# EAGLE board for_china (EAGLE 6.3)
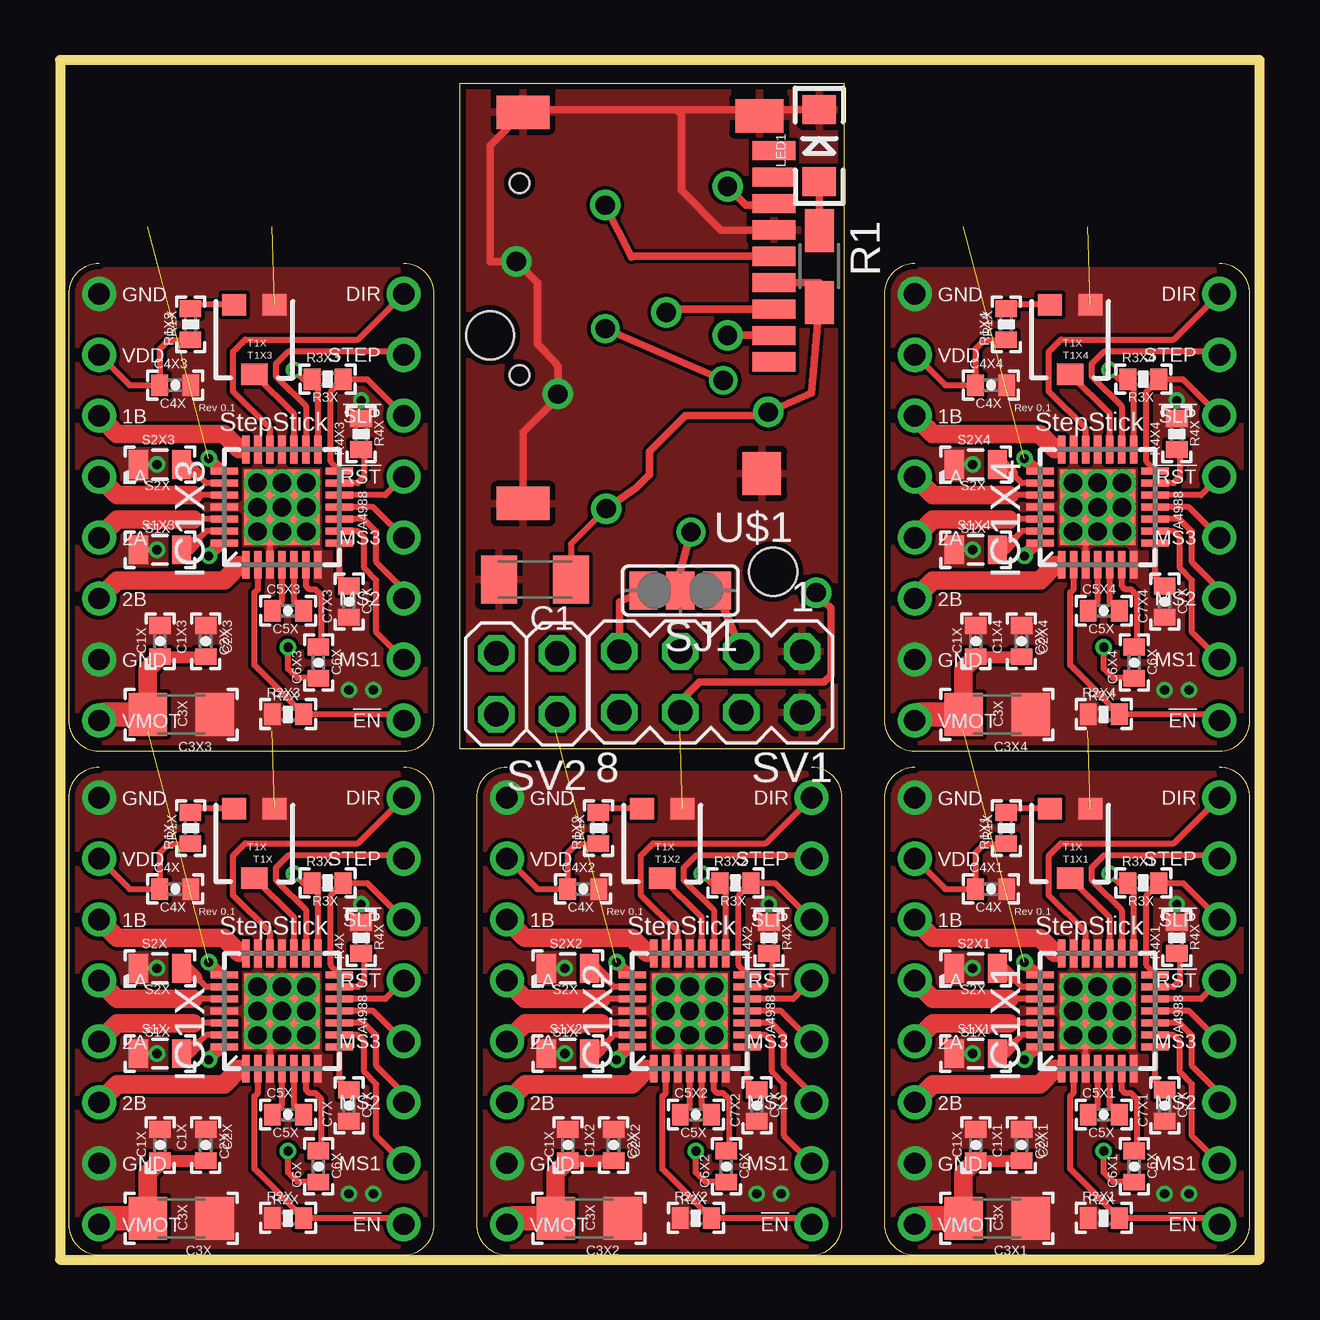
[diagram p0: board, top side]
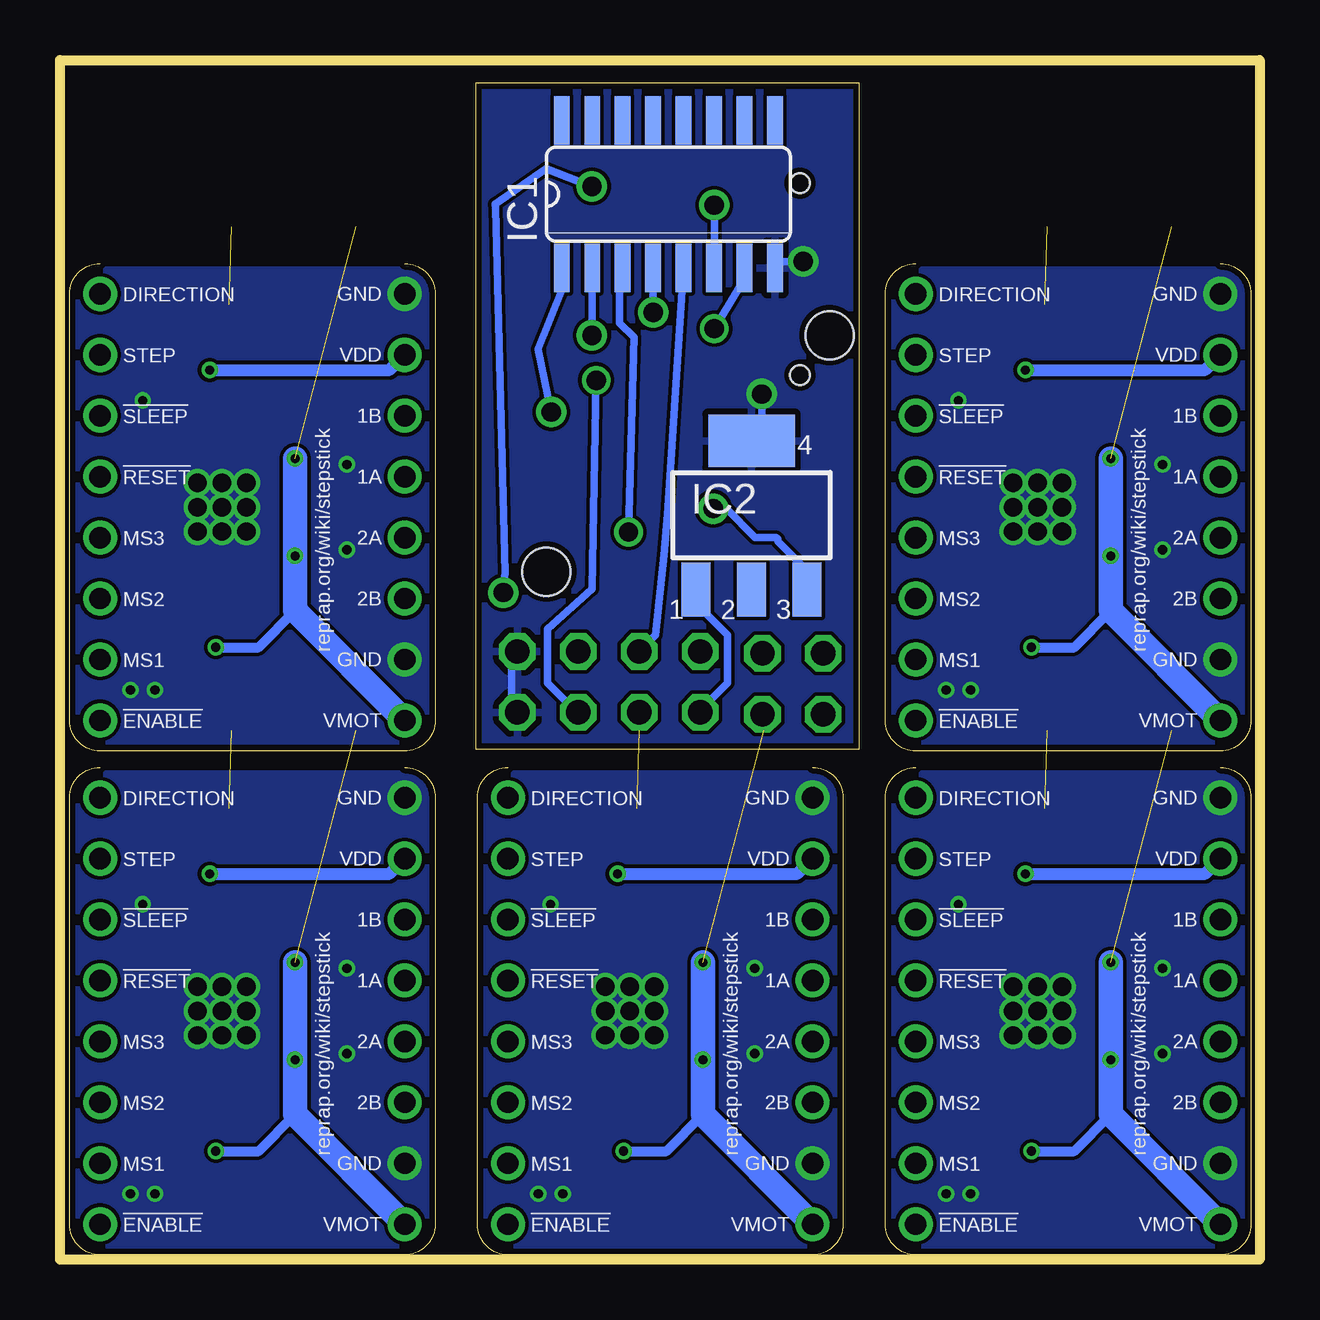
[diagram p1: board, bottom side, seen from below]

Size 50 x 50 mm. Coordinates in mm from the lower left corner, seen from the top.
Outline: 14.33,20.52 arc-90 15.6,19.25 15.6,1.47 arc-90 14.33,0.2 1.63,0.2 arc-90 0.36,1.47 0.36,19.25 arc-90 1.63,20.52
Outline: 48.33,20.52 arc-90 49.6,19.25 49.6,1.47 arc-90 48.33,0.2 35.63,0.2 arc-90 34.36,1.47 34.36,19.25 arc-90 35.63,20.52
Outline: 31.33,20.52 arc-90 32.6,19.25 32.6,1.47 arc-90 31.33,0.2 18.63,0.2 arc-90 17.36,1.47 17.36,19.25 arc-90 18.63,20.52
Outline: 14.33,41.52 arc-90 15.6,40.25 15.6,22.47 arc-90 14.33,21.2 1.63,21.2 arc-90 0.36,22.47 0.36,40.25 arc-90 1.63,41.52
Outline: 48.33,41.52 arc-90 49.6,40.25 49.6,22.47 arc-90 48.33,21.2 35.63,21.2 arc-90 34.36,22.47 34.36,40.25 arc-90 35.63,41.52
Outline: 0,0 50,0 50,50 0,50 0,0
Outline: 32.67,21.27 16.68,21.27 16.68,49.02 32.67,49.02 32.67,21.27
Copper layers (1*16): Top 0.035mm / dielectric 1.5mm / Bottom 0.035mm
Design rules "ITead_rule": minimum track width 6mil, minimum drill 12mil, track to track 6mil, track to pad 6mil, pad to pad 6mil, via to via 6mil, smd to smd 0mil, copper to edge 10mil, drill to drill 10mil, minimum pad ring 10mil, minimum via ring 6mil, stop-mask expansion 2mil, vias tented up to drill 100mil, thermal gap 10mil
Holes 2 mm at 17.93,38.52 29.73,28.68

## Footprints (pad centres in the part's own frame; a part is rotated, then mirrored left to right if it is on the bottom)
C1206K = smd 1.5 x 2: 1 -1.5,0; 2 1.5,0
0402-CAP = smd 0.7 x 0.9: 1 -0.65,0; 2 0.65,0
1206 = smd 1.6 x 1.8: 1 -1.4,0; 2 1.4,0
SO16 = smd 0.66 x 2.032: 1 -4.445,-3.073; 2 -3.175,-3.073; 3 -1.905,-3.073; 4 -0.635,-3.073; 5 0.635,-3.073; 6 1.905,-3.073; 7 3.175,-3.073; 8 4.445,-3.073; 9 4.445,3.073; 10 3.175,3.073; 11 1.905,3.073; 12 0.635,3.073; 13 -0.635,3.073; 14 -1.905,3.073; 15 -3.175,3.073; 16 -4.445,3.073
QFN28ET = smd 1.15 x 0.3: 1 -2.4,1.5; 2 -2.4,1; 3 -2.4,0.5; 4 -2.4,0; 5 -2.4,-0.5; 6 -2.4,-1; 7 -2.4,-1.5; 15 2.4,-1.5; 16 2.4,-1; 17 2.4,-0.5; 18 2.4,0; 19 2.4,0.5; 20 2.4,1; 21 2.4,1.5 | smd 0.3 x 1.15: 8 -1.5,-2.4; 9 -1,-2.4; 10 -0.5,-2.4; 11 0,-2.4; 12 0.5,-2.4; 13 1,-2.4; 14 1.5,-2.4; 22 1.5,2.4; 23 1,2.4; 24 0.5,2.4; 25 0,2.4; 26 -0.5,2.4; 27 -1,2.4; 28 -1.5,2.4 | smd 3.15 x 3.15: EXP 0,0
SOT223 = smd 1.219 x 2.235: 1 -2.311,-3.099; 2 0,-3.099; 3 2.311,-3.099 | smd 3.6 x 2.2: 4 0,3.099
CLONOLU = drill 0.889 pad 1.422: 1A 6.35,-1.27; 1B 6.35,-3.81; 2A 6.35,1.27; 2B 6.35,3.81; !EN -6.35,8.89; !RST -6.35,-1.27; !SLP -6.35,-3.81; DIR -6.35,-8.89; GND$1 6.35,6.35; GND$2 6.35,-8.89; MS1 -6.35,6.35; MS2 -6.35,3.81; MS3 -6.35,1.27; STEP -6.35,-6.35; VDD 6.35,-6.35; VMOT 6.35,8.89
LED-1206 = smd 1.2 x 1.4: A -1.5,0; C 1.5,0
R1206W = smd 1.8 x 1.2: 1 -1.499,0; 2 1.499,0
0402-RES = smd 0.7 x 0.9: 1 -0.65,0; 2 0.65,0
0805 = smd 0.8 x 1.2: 1 -0.9,0; 2 0.9,0
SJ_2 = smd 1.168 x 1.6: 1 -1.524,0; 2 0,0; 3 1.524,0
MA04-2 = drill 1.016 octagon: 1 -3.81,-1.27; 2 -3.81,1.27; 3 -1.27,-1.27; 4 -1.27,1.27; 5 1.27,-1.27; 6 1.27,1.27; 7 3.81,-1.27; 8 3.81,1.27
2X02 = drill 1.016 octagon: 1 -1.27,-1.27; 2 -1.27,1.27; 3 1.27,-1.27; 4 1.27,1.27
TRIMPOT-3MM = smd 1 x 0.9: 1 -0.85,-1.45; 3 0.85,-1.45 | smd 1.1 x 0.9: 2 0,1.45
MICROSD_PP = smd 1.8 x 0.8: 1 0,3.85; 2 0,2.75; 3 0,1.65; 4 0,0.55; 5 0,-0.55; 6 0,-1.65; 7 0,-2.75; 8 0,-3.85; 9 0,-4.95 | smd 1.6 x 1.8: GND@1 0.5,8.5 | smd 2.2 x 1.4: GND@2 10.45,9.75; GND@4 10.45,-6.55 | smd 2 x 1.4: GND@3 0.6,-6.4 | hole 0.8: 10.6,4.4; 10.6,-3.6

## Placement (x,y rotation side)
C1  [C1206K]  19.8,28.35 180 top
C1X  .1uf  [0402-CAP]  4.17,4.77 270 top
C1X1  .1uf  [0402-CAP]  38.17,4.77 270 top
C1X2  .1uf  [0402-CAP]  21.17,4.77 270 top
C1X3  .1uf  [0402-CAP]  4.17,25.77 270 top
C1X4  .1uf  [0402-CAP]  38.17,25.77 270 top
C2X  .1uf  [0402-CAP]  6.08,4.77 270 top
C2X1  .1uf  [0402-CAP]  40.08,4.77 270 top
C2X2  .1uf  [0402-CAP]  23.07,4.77 270 top
C2X3  .1uf  [0402-CAP]  6.08,25.77 270 top
C2X4  .1uf  [0402-CAP]  40.08,25.77 270 top
C3X  4.7uF  [1206]  5.06,1.72 180 top
C3X1  4.7uF  [1206]  39.06,1.72 180 top
C3X2  4.7uF  [1206]  22.06,1.72 180 top
C3X3  4.7uF  [1206]  5.06,22.72 180 top
C3X4  4.7uF  [1206]  39.06,22.72 180 top
C4X  .22uf  [0402-CAP]  4.8,15.44 0 top
C4X1  .22uf  [0402-CAP]  38.8,15.44 0 top
C4X2  .22uf  [0402-CAP]  21.8,15.44 0 top
C4X3  .22uf  [0402-CAP]  4.8,36.44 0 top
C4X4  .22uf  [0402-CAP]  38.8,36.44 0 top
C5X  .1uf  [0402-CAP]  9.5,6.04 0 top
C5X1  .1uf  [0402-CAP]  43.5,6.04 0 top
C5X2  .1uf  [0402-CAP]  26.5,6.04 0 top
C5X3  .1uf  [0402-CAP]  9.5,27.04 0 top
C5X4  .1uf  [0402-CAP]  43.5,27.04 0 top
C6X  .1uf  [0402-CAP]  10.77,3.88 90 top
C6X1  .1uf  [0402-CAP]  44.77,3.88 90 top
C6X2  .1uf  [0402-CAP]  27.77,3.88 90 top
C6X3  .1uf  [0402-CAP]  10.77,24.88 90 top
C6X4  .1uf  [0402-CAP]  44.77,24.88 90 top
C7X  .22uf  [0402-CAP]  12.04,6.42 90 top
C7X1  .22uf  [0402-CAP]  46.04,6.42 90 top
C7X2  .22uf  [0402-CAP]  29.04,6.42 90 top
C7X3  .22uf  [0402-CAP]  12.04,27.42 90 top
C7X4  .22uf  [0402-CAP]  46.04,27.42 90 top
IC1  4050D  [SO16]  24.64,44.41 0 bottom
IC1X  A4988  [QFN28ET]  9.25,10.36 90 top
IC1X1  A4988  [QFN28ET]  43.25,10.36 90 top
IC1X2  A4988  [QFN28ET]  26.25,10.36 90 top
IC1X3  A4988  [QFN28ET]  9.25,31.36 90 top
IC1X4  A4988  [QFN28ET]  43.25,31.36 90 top
IC2  LM340MP-05  [SOT223]  21.18,31.02 0 bottom
J1X  CLONOLU  [CLONOLU]  7.98,10.36 180 top
J1X1  CLONOLU  [CLONOLU]  41.98,10.36 180 top
J1X2  CLONOLU  [CLONOLU]  24.98,10.36 180 top
J1X3  CLONOLU  [CLONOLU]  7.98,31.36 180 top
J1X4  CLONOLU  [CLONOLU]  41.98,31.36 180 top
LED1  [LED-1206]  31.65,46.42 90 top
R1  [R1206W]  31.65,41.39 270 top
R1X  20k  [0402-RES]  5.44,17.98 90 top
R1X1  20k  [0402-RES]  39.44,17.98 90 top
R1X2  20k  [0402-RES]  22.44,17.98 90 top
R1X3  20k  [0402-RES]  5.44,38.98 90 top
R1X4  20k  [0402-RES]  39.44,38.98 90 top
R2X  100k  [0402-RES]  9.5,1.72 0 top
R2X1  100k  [0402-RES]  43.5,1.72 0 top
R2X2  100k  [0402-RES]  26.5,1.72 0 top
R2X3  100k  [0402-RES]  9.5,22.72 0 top
R2X4  100k  [0402-RES]  43.5,22.72 0 top
R3X  100k  [0402-RES]  11.15,15.69 0 top
R3X1  100k  [0402-RES]  45.16,15.69 0 top
R3X2  100k  [0402-RES]  28.16,15.69 0 top
R3X3  100k  [0402-RES]  11.15,36.69 0 top
R3X4  100k  [0402-RES]  45.16,36.69 0 top
R4X  10k  [0402-RES]  12.55,13.41 90 top
R4X1  10k  [0402-RES]  46.55,13.41 90 top
R4X2  10k  [0402-RES]  29.55,13.41 90 top
R4X3  10k  [0402-RES]  12.55,34.41 90 top
R4X4  10k  [0402-RES]  46.55,34.41 90 top
S1X  0.2  [0805]  4.17,8.58 0 top
S1X1  0.2  [0805]  38.17,8.58 0 top
S1X2  0.2  [0805]  21.17,8.58 0 top
S1X3  0.2  [0805]  4.17,29.58 0 top
S1X4  0.2  [0805]  38.17,29.58 0 top
S2X  0.2  [0805]  4.17,12.14 0 top
S2X1  0.2  [0805]  38.17,12.14 0 top
S2X2  0.2  [0805]  21.17,12.14 0 top
S2X3  0.2  [0805]  4.17,33.14 0 top
S2X4  0.2  [0805]  38.17,33.14 0 top
SJ1  [SJ_2]  25.86,27.89 180 top
SV1  [MA04-2]  27.12,24.07 180 top
SV2  [2X02]  19.45,24 180 top
T1X  TRIM  [TRIMPOT-3MM]  8.11,17.34 180 top
T1X1  TRIM  [TRIMPOT-3MM]  42.11,17.34 180 top
T1X2  TRIM  [TRIMPOT-3MM]  25.11,17.34 180 top
T1X3  TRIM  [TRIMPOT-3MM]  8.11,38.34 180 top
T1X4  TRIM  [TRIMPOT-3MM]  42.11,38.34 180 top
U$1  MICROSD_PP  [MICROSD_PP]  29.75,41.27 180 top

## Library data of the parts
C1 R1 = rcl
C1X C1X1-C1X4 C2X C2X1-C2X4 C3X C3X1-C3X4 C4X C4X1-C4X4 C5X C5X1-C5X4 C6X C6X1-C6X4 C7X C7X1-C7X4 LED1 R1X R1X1-R1X4 R2X R2X1-R2X4 R3X R3X1-R3X4 R4X R4X1-R4X4 S1X S1X1-S1X4 S2X S2X1-S2X4 SJ1 T1X T1X1-T1X4 = SparkFun
IC1 = 40xx
IC1X IC1X1-IC1X4 = allegro; MPN: A4983SETTR-T; OC_FARNELL: 1688956; OC_NEWARK: 39M6763
IC2 = linear
J1X J1X1-J1X4 = pololu-allegro
SV1 = con-lstb; OC_FARNELL: unknown; OC_NEWARK: unknown
SV2 = pinhead
U$1 = DE1594

## Nets
GND: C1X.1 C2X.1 C3X.1 C4X.2 C7X.1 IC1X.3 IC1X.7 IC1X.18 IC1X.20 IC1X.25 IC1X.EXP J1X.GND$1 J1X.GND$2 R2X.1 R4X.2 S1X.1 S2X.1 T1X.1
GND1: C1X1.1 C2X1.1 C3X1.1 C4X1.2 C7X1.1 IC1X1.3 IC1X1.7 IC1X1.18 IC1X1.20 IC1X1.25 IC1X1.EXP J1X1.GND$1 J1X1.GND$2 R2X1.1 R4X1.2 S1X1.1 S2X1.1 T1X1.1
GND2: C1X2.1 C2X2.1 C3X2.1 C4X2.2 C7X2.1 IC1X2.3 IC1X2.7 IC1X2.18 IC1X2.20 IC1X2.25 IC1X2.EXP J1X2.GND$1 J1X2.GND$2 R2X2.1 R4X2.2 S1X2.1 S2X2.1 T1X2.1
GND3: C1X3.1 C2X3.1 C3X3.1 C4X3.2 C7X3.1 IC1X3.3 IC1X3.7 IC1X3.18 IC1X3.20 IC1X3.25 IC1X3.EXP J1X3.GND$1 J1X3.GND$2 R2X3.1 R4X3.2 S1X3.1 S2X3.1 T1X3.1
GND4: C1.2 IC1.8 IC2.4 LED1.C SV1.1 SV1.2 U$1.6 U$1.GND@1 U$1.GND@2 U$1.GND@3 U$1.GND@4
GND5: C1X4.1 C2X4.1 C3X4.1 C4X4.2 C7X4.1 IC1X4.3 IC1X4.7 IC1X4.18 IC1X4.20 IC1X4.25 IC1X4.EXP J1X4.GND$1 J1X4.GND$2 R2X4.1 R4X4.2 S1X4.1 S2X4.1 T1X4.1
N$1: IC1.2 U$1.2
N$2: IC1.4 U$1.3
N$3: IC1.6 U$1.5
N$4: SV1.6 U$1.7
N$5: SJ1.3 SV1.7
N$6: IC1.3 SJ1.1 SJ1.2 SV1.3
N$8: IC1.7 SV1.4
N$9: IC1.5 SV1.5
N$10: IC2.1 SV1.8
N$11: LED1.A R1.1
VCC: C1.1 IC1.1 IC2.3 R1.2 U$1.4
VDD: C4X.1 IC1X.15 J1X.VDD R1X.1 R3X.1
VDD1: C4X1.1 IC1X1.15 J1X1.VDD R1X1.1 R3X1.1
VDD2: C4X2.1 IC1X2.15 J1X2.VDD R1X2.1 R3X2.1
VDD3: C4X3.1 IC1X3.15 J1X3.VDD R1X3.1 R3X3.1
VDD4: C4X4.1 IC1X4.15 J1X4.VDD R1X4.1 R3X4.1
VMOT: C1X.2 C2X.2 C3X.2 C6X.1 IC1X.22 IC1X.28 J1X.VMOT
VMOT1: C1X1.2 C2X1.2 C3X1.2 C6X1.1 IC1X1.22 IC1X1.28 J1X1.VMOT
VMOT2: C1X2.2 C2X2.2 C3X2.2 C6X2.1 IC1X2.22 IC1X2.28 J1X2.VMOT
VMOT3: C1X3.2 C2X3.2 C3X3.2 C6X3.1 IC1X3.22 IC1X3.28 J1X3.VMOT
VMOT4: C1X4.2 C2X4.2 C3X4.2 C6X4.1 IC1X4.22 IC1X4.28 J1X4.VMOT
XCP1: C5X.1 IC1X.4
XCP2: C5X.2 IC1X.5
XCP3: C5X1.1 IC1X1.4
XCP4: C5X1.2 IC1X1.5
XCP5: C5X2.1 IC1X2.4
XCP6: C5X2.2 IC1X2.5
XCP7: C5X3.1 IC1X3.4
XCP8: C5X3.2 IC1X3.5
XCP9: C5X4.1 IC1X4.4
XCP10: C5X4.2 IC1X4.5
XDIR: IC1X.19 J1X.DIR
XDIR1: IC1X1.19 J1X1.DIR
XDIR2: IC1X2.19 J1X2.DIR
XDIR3: IC1X3.19 J1X3.DIR
XDIR4: IC1X4.19 J1X4.DIR
XENABLE: IC1X.2 J1X.!EN R2X.2
XENABLE1: IC1X1.2 J1X1.!EN R2X1.2
XENABLE2: IC1X2.2 J1X2.!EN R2X2.2
XENABLE3: IC1X3.2 J1X3.!EN R2X3.2
XENABLE4: IC1X4.2 J1X4.!EN R2X4.2
XMS1: IC1X.9 J1X.MS1
XMS2: IC1X.10 J1X.MS2
XMS3: IC1X.11 J1X.MS3
XMS4: IC1X1.9 J1X1.MS1
XMS5: IC1X1.10 J1X1.MS2
XMS6: IC1X1.11 J1X1.MS3
XMS7: IC1X2.9 J1X2.MS1
XMS8: IC1X2.10 J1X2.MS2
XMS9: IC1X2.11 J1X2.MS3
XMS10: IC1X3.9 J1X3.MS1
XMS11: IC1X3.10 J1X3.MS2
XMS12: IC1X3.11 J1X3.MS3
XMS13: IC1X4.9 J1X4.MS1
XMS14: IC1X4.10 J1X4.MS2
XMS15: IC1X4.11 J1X4.MS3
XOUT1A: IC1X.24 J1X.1A
XOUT1A1: IC1X1.24 J1X1.1A
XOUT1A2: IC1X2.24 J1X2.1A
XOUT1A3: IC1X3.24 J1X3.1A
XOUT1A4: IC1X4.24 J1X4.1A
XOUT1B: IC1X.21 J1X.1B
XOUT1B1: IC1X1.21 J1X1.1B
XOUT1B2: IC1X2.21 J1X2.1B
XOUT1B3: IC1X3.21 J1X3.1B
XOUT1B4: IC1X4.21 J1X4.1B
XOUT2A: IC1X.26 J1X.2A
XOUT2A1: IC1X1.26 J1X1.2A
XOUT2A2: IC1X2.26 J1X2.2A
XOUT2A3: IC1X3.26 J1X3.2A
XOUT2A4: IC1X4.26 J1X4.2A
XOUT2B: IC1X.1 J1X.2B
XOUT2B1: IC1X1.1 J1X1.2B
XOUT2B2: IC1X2.1 J1X2.2B
XOUT2B3: IC1X3.1 J1X3.2B
XOUT2B4: IC1X4.1 J1X4.2B
XREF: IC1X.17 T1X.2
XREF1: IC1X1.17 T1X1.2
XREF2: R1X.2 T1X.3
XREF3: R1X1.2 T1X1.3
XREF4: IC1X2.17 T1X2.2
XREF5: R1X2.2 T1X2.3
XREF6: IC1X3.17 T1X3.2
XREF7: R1X3.2 T1X3.3
XREF8: IC1X4.17 T1X4.2
XREF9: R1X4.2 T1X4.3
XRESET: IC1X.12 J1X.!RST
XRESET1: IC1X1.12 J1X1.!RST
XRESET2: IC1X2.12 J1X2.!RST
XRESET3: IC1X3.12 J1X3.!RST
XRESET4: IC1X4.12 J1X4.!RST
XROSC: IC1X.13 R4X.1
XROSC1: IC1X1.13 R4X1.1
XROSC2: IC1X2.13 R4X2.1
XROSC3: IC1X3.13 R4X3.1
XROSC4: IC1X4.13 R4X4.1
XSENSE1: IC1X.23 S2X.2
XSENSE2: IC1X.27 S1X.2
XSENSE3: IC1X1.27 S1X1.2
XSENSE4: IC1X1.23 S2X1.2
XSENSE5: IC1X2.27 S1X2.2
XSENSE6: IC1X2.23 S2X2.2
XSENSE7: IC1X3.27 S1X3.2
XSENSE8: IC1X3.23 S2X3.2
XSENSE9: IC1X4.27 S1X4.2
XSENSE10: IC1X4.23 S2X4.2
XSLEEP: IC1X.14 J1X.!SLP R3X.2
XSLEEP1: IC1X1.14 J1X1.!SLP R3X1.2
XSLEEP2: IC1X2.14 J1X2.!SLP R3X2.2
XSLEEP3: IC1X3.14 J1X3.!SLP R3X3.2
XSLEEP4: IC1X4.14 J1X4.!SLP R3X4.2
XSTEP: IC1X.16 J1X.STEP
XSTEP1: IC1X1.16 J1X1.STEP
XSTEP2: IC1X2.16 J1X2.STEP
XSTEP3: IC1X3.16 J1X3.STEP
XSTEP4: IC1X4.16 J1X4.STEP
XVCP: C6X.2 IC1X.6
XVCP1: C6X1.2 IC1X1.6
XVCP2: C6X2.2 IC1X2.6
XVCP3: C6X3.2 IC1X3.6
XVCP4: C6X4.2 IC1X4.6
XVREG: C7X.2 IC1X.8
XVREG1: C7X1.2 IC1X1.8
XVREG2: C7X2.2 IC1X2.8
XVREG3: C7X3.2 IC1X3.8
XVREG4: C7X4.2 IC1X4.8

## Tracks (layer width: path | path; a pad name or v marks a point on that pad's centre or on a via)
GND  (via drill 0.38, 0.76)  (1 unrouted)
  Top 0.254: IC1X.3 8.75,8.84 arc-90 v9.25,9.34
  other vias: 4.04,8.58 4.04,12.14 8.23,10.36 8.23,9.34 8.23,11.38 10.27,11.38 10.27,9.34 9.25,10.36 9.25,11.38 10.27,10.36 12.55,14.8 13.06,2.74 12.04,2.74
  pour Top (rank 6, no thermals): 0.36,0.2 0.36,20.27 15.6,20.27 15.6,0.2
  pour Bottom (rank 6, no thermals): 0.36,0.2 0.36,20.27 15.6,20.27 15.6,0.2
GND1  (via drill 0.38, 0.76)  (1 unrouted)
  Top 0.254: IC1X1.3 42.75,8.84 arc-90 v43.25,9.34
  other vias: 38.04,8.58 38.04,12.14 42.23,10.36 42.23,9.34 42.23,11.38 44.27,11.38 44.27,9.34 43.25,10.36 43.25,11.38 44.27,10.36 46.55,14.8 47.06,2.74 46.04,2.74
  pour Top (rank 6, no thermals): 34.36,0.2 34.36,20.27 49.6,20.27 49.6,0.2
  pour Bottom (rank 6, no thermals): 34.36,0.2 34.36,20.27 49.6,20.27 49.6,0.2
GND2  (via drill 0.38, 0.76)  (1 unrouted)
  Top 0.254: IC1X2.3 25.75,8.84 arc-90 v26.25,9.34
  other vias: 21.04,8.58 21.04,12.14 25.23,10.36 25.23,9.34 25.23,11.38 27.27,11.38 27.27,9.34 26.25,10.36 26.25,11.38 27.27,10.36 29.55,14.8 30.06,2.74 29.04,2.74
  pour Top (rank 6, no thermals): 17.36,0.2 17.36,20.27 32.6,20.27 32.6,0.2
  pour Bottom (rank 6, no thermals): 17.36,0.2 17.36,20.27 32.6,20.27 32.6,0.2
GND3  (via drill 0.38, 0.76)  (1 unrouted)
  Top 0.254: IC1X3.3 8.75,29.84 arc-90 v9.25,30.34
  other vias: 4.04,29.58 4.04,33.14 8.23,31.36 8.23,30.34 8.23,32.38 10.27,32.38 10.27,30.34 9.25,31.36 9.25,32.38 10.27,31.36 12.55,35.8 13.06,23.74 12.04,23.74
  pour Top (rank 6, no thermals): 0.36,21.2 0.36,41.27 15.6,41.27 15.6,21.2
  pour Bottom (rank 6, no thermals): 0.36,21.2 0.36,41.27 15.6,41.27 15.6,21.2
GND4  (via drill 0.8 pad 1.27)
  Top 0.305: U$1.GND@2 19.3,34.48 20.75,35.92 v20.75,36.08 20.75,37.25 20.68,37.33 20.68,37.38 19.9,38.15 19.9,40.73 v19.02,41.6 17.93,41.6 17.93,46.44 U$1.GND@4 19.41,47.92 25.7,47.92 | 25.7,47.92 29.41,47.92 | 29.41,47.92 LED1.C | 29.41,47.92 U$1.GND@3 | U$1.6 27.56,42.91 25.9,44.58 25.9,47.73 25.7,47.92
  Bottom 0.305: SV1.1 31.18,25.02 31.18,23.02 SV1.2 | v19.02,41.6 20.2,41.6 20.2,41.35 IC1.8 | v20.75,36.08 20.75,34.12 IC2.4
  pour Top: 16.93,21.52 16.93,48.77 32.42,48.77 32.42,21.52
  pour Bottom: 16.93,21.52 16.93,48.77 32.42,48.77 32.42,21.52
GND5  (via drill 0.38, 0.76)  (1 unrouted)
  Top 0.254: IC1X4.3 42.75,29.84 arc-90 v43.25,30.34
  other vias: 38.04,29.58 38.04,33.14 42.23,31.36 42.23,30.34 42.23,32.38 44.27,32.38 44.27,30.34 43.25,31.36 43.25,32.38 44.27,31.36 46.55,35.8 47.06,23.74 46.04,23.74
  pour Top (rank 6, no thermals): 34.36,21.2 34.36,41.27 49.6,41.27 49.6,21.2
  pour Bottom (rank 6, no thermals): 34.36,21.2 34.36,41.27 49.6,41.27 49.6,21.2
N$1  (via drill 0.8 pad 1.27)
  Top 0.305: v27.82,38.52 U$1.2
  Bottom 0.305: v27.82,38.52 IC1.2
N$2  (via drill 0.8 pad 1.27)
  Top 0.305: v25.27,39.48 25.43,39.62 U$1.3
  Bottom 0.305: v25.27,39.48 IC1.4
N$3  (via drill 0.8 pad 1.27)
  Top 0.305: U$1.5 28.23,41.81 23.98,41.83 23.82,41.77 v22.73,43.95
  Bottom 0.305: v22.73,43.95 22.73,41.35 IC1.6
N$4  (via drill 0.8 pad 1.27)
  Top 0.305: SV1.6 25.86,23.28 26.65,24.07 31.85,24.07 32.12,24.35 32.12,27.15 31.9,27.38 v31.52,27.8 | v27.82,44.73 28.6,43.95 29.75,43.95 U$1.7
  Bottom 0.305: v31.52,27.8 31.45,28.62 31.85,43.83 31.88,44 29.75,45.48 v27.82,44.73
N$5
  Top 0.305: SV1.7 23.32,27.4 SJ1.3
N$6  (via drill 0.8)
  Top 0.254: SJ1.1 SJ1.2
  Top 0.305: SV1.3 28.39,25.37 SJ1.1 | v26.3,30.32 25.68,28.02 SJ1.2
  Bottom 0.305: IC1.3 26.68,40.52 26.68,39.02 26.07,38.45 v26.3,30.32
N$8  (via drill 0.8)
  Top 0.305: v27.65,36.65 v22.73,38.8
  Bottom 0.305: SV1.4 28.45,22.8 29.68,24.02 29.68,26.27 27.82,27.95 v27.65,36.65 | v22.73,38.8 21.68,40.52 IC1.7
N$9
  Bottom 0.305: IC1.5 24.68,31.05 24.82,29.38 25.18,26.02 SV1.5
N$10
  Bottom 0.305: SV1.8 23.32,22.89 22.18,24.02 22.18,26.02 23.18,27.02 23.18,27.61 IC2.1
N$11
  Top 0.305: R1.1 LED1.A
VCC  (via drill 0.8 pad 1.27)
  Top 0.254: v29.52,35.33 29.9,34.95 | C1.1 21.3,29.82 v22.77,31.3
  Top 0.305: U$1.4 29.77,40.73 31.65,40.73 R1.2 31.32,36.12 v29.52,35.33 29.7,35.17 26.07,35.17 24.57,33.67 24.57,32.73 24.02,32.17 v22.77,31.3
  Bottom 0.305: IC1.1 29.07,41.33 29.07,40.42 30.07,37.95 v29.52,35.33 | 18.86,28.73 IC2.3 | 18.86,28.73 18.86,28.81 | v22.77,31.3 22.23,31.3 21.02,30.1 20.15,30.1 20.07,30.02 20.07,29.94 18.86,28.73
VDD  (via drill 0.38)
  Top 0.254: IC1X.15 10.75,15.45 R3X.1 10.14,15.69 v9.76,16.07 | R1X.1 4.54,17.33 4.17,16.96 4.17,15.46 C4X.1 2.9,15.44 J1X.VDD
  Bottom 0.508: v9.76,16.07 2.27,16.07 J1X.VDD
VDD1  (via drill 0.38)
  Top 0.254: IC1X1.15 44.75,15.45 R3X1.1 44.14,15.69 v43.76,16.07 | R1X1.1 38.54,17.33 38.17,16.96 38.17,15.46 C4X1.1 36.9,15.44 J1X1.VDD
  Bottom 0.508: v43.76,16.07 36.27,16.07 J1X1.VDD
VDD2  (via drill 0.38)
  Top 0.254: IC1X2.15 27.75,15.45 R3X2.1 27.14,15.69 v26.76,16.07 | R1X2.1 21.54,17.33 21.17,16.96 21.17,15.46 C4X2.1 19.9,15.44 J1X2.VDD
  Bottom 0.508: v26.76,16.07 19.27,16.07 J1X2.VDD
VDD3  (via drill 0.38)
  Top 0.254: IC1X3.15 10.75,36.45 R3X3.1 10.14,36.69 v9.76,37.08 | R1X3.1 4.54,38.33 4.17,37.96 4.17,36.45 C4X3.1 2.9,36.44 J1X3.VDD
  Bottom 0.508: v9.76,37.08 2.27,37.08 J1X3.VDD
VDD4  (via drill 0.38)
  Top 0.254: IC1X4.15 44.75,36.45 R3X4.1 44.14,36.69 v43.76,37.08 | R1X4.1 38.54,38.33 38.17,37.96 38.17,36.45 C4X4.1 36.9,36.44 J1X4.VDD
  Bottom 0.508: v43.76,37.08 36.27,37.08 J1X4.VDD
VMOT  (via drill 0.38)  (1 unrouted)
  Top 0.254: 6.58,8.71 6.84,8.85 IC1X.28 | 6.58,12.01 6.84,11.87 IC1X.22 | C6X.1 9.9,3.23 9.5,3.63 v9.5,4.52
  Top 0.508: v6.2,8.33 6.58,8.71 | v6.2,12.39 6.58,12.01 | C1X.2 C2X.2 6.09,4.14
  Top 0.762: C1X.2 3.66,3.61 C3X.2
  Top 1.016: C3X.2 1.88,1.72 J1X.VMOT
  Bottom 0.406: v9.5,4.52 7.73,4.52 6.2,6.04
  Bottom 1.016: v6.2,12.39 v6.2,8.33 6.2,6.04 J1X.VMOT
VMOT1  (via drill 0.38)  (1 unrouted)
  Top 0.254: 40.58,8.71 40.84,8.85 IC1X1.28 | 40.58,12.01 40.84,11.87 IC1X1.22 | C6X1.1 43.9,3.23 43.5,3.63 v43.5,4.52
  Top 0.508: v40.2,8.33 40.58,8.71 | v40.2,12.39 40.58,12.01 | C1X1.2 C2X1.2 40.09,4.14
  Top 0.762: C1X1.2 37.66,3.61 C3X1.2
  Top 1.016: C3X1.2 35.88,1.72 J1X1.VMOT
  Bottom 0.406: v43.5,4.52 41.73,4.52 40.2,6.04
  Bottom 1.016: v40.2,12.39 v40.2,8.33 40.2,6.04 J1X1.VMOT
VMOT2  (via drill 0.38)  (1 unrouted)
  Top 0.254: 23.58,8.71 23.84,8.85 IC1X2.28 | 23.58,12.01 23.84,11.87 IC1X2.22 | C6X2.1 26.9,3.23 26.5,3.63 v26.5,4.52
  Top 0.508: v23.2,8.33 23.58,8.71 | v23.2,12.39 23.58,12.01 | C1X2.2 C2X2.2 23.09,4.14
  Top 0.762: C1X2.2 20.66,3.61 C3X2.2
  Top 1.016: C3X2.2 18.88,1.72 J1X2.VMOT
  Bottom 0.406: v26.5,4.52 24.73,4.52 23.2,6.04
  Bottom 1.016: v23.2,12.39 v23.2,8.33 23.2,6.04 J1X2.VMOT
VMOT3  (via drill 0.38)  (1 unrouted)
  Top 0.254: 6.58,29.71 6.84,29.85 IC1X3.28 | 6.58,33.01 6.84,32.87 IC1X3.22 | C6X3.1 9.9,24.23 9.5,24.63 v9.5,25.52
  Top 0.508: v6.2,29.33 6.58,29.71 | v6.2,33.39 6.58,33.01 | C1X3.2 C2X3.2 6.09,25.14
  Top 0.762: C1X3.2 3.66,24.61 C3X3.2
  Top 1.016: C3X3.2 1.88,22.72 J1X3.VMOT
  Bottom 0.406: v9.5,25.52 7.73,25.52 6.2,27.04
  Bottom 1.016: v6.2,33.39 v6.2,29.33 6.2,27.04 J1X3.VMOT
VMOT4  (via drill 0.38)  (1 unrouted)
  Top 0.254: 40.58,29.71 40.84,29.85 IC1X4.28 | 40.58,33.01 40.84,32.87 IC1X4.22 | C6X4.1 43.9,24.23 43.5,24.63 v43.5,25.52
  Top 0.508: v40.2,29.33 40.58,29.71 | v40.2,33.39 40.58,33.01 | C1X4.2 C2X4.2 40.09,25.14
  Top 0.762: C1X4.2 37.66,24.61 C3X4.2
  Top 1.016: C3X4.2 35.88,22.72 J1X4.VMOT
  Bottom 0.406: v43.5,25.52 41.73,25.52 40.2,27.04
  Bottom 1.016: v40.2,33.39 v40.2,29.33 40.2,27.04 J1X4.VMOT
XCP1
  Top 0.254: IC1X.4 9.25,6.44 C5X.1
XCP2
  Top 0.254: IC1X.5 9.75,7.07 9.76,7.06 9.76,6.44 C5X.2
XCP3
  Top 0.254: IC1X1.4 43.25,6.44 C5X1.1
XCP4
  Top 0.254: IC1X1.5 43.75,7.07 43.76,7.06 43.76,6.44 C5X1.2
XCP5
  Top 0.254: IC1X2.4 26.25,6.44 C5X2.1
XCP6
  Top 0.254: IC1X2.5 26.75,7.07 26.76,7.06 26.76,6.44 C5X2.2
XCP7
  Top 0.254: IC1X3.4 9.25,27.44 C5X3.1
XCP8
  Top 0.254: IC1X3.5 9.75,28.07 9.76,28.06 9.76,27.44 C5X3.2
XCP9
  Top 0.254: IC1X4.4 43.25,27.44 C5X4.1
XCP10
  Top 0.254: IC1X4.5 43.75,28.07 43.76,28.06 43.76,27.44 C5X4.2
XDIR
  Top 0.254: IC1X.19 8.75,13.65 7.22,15.19 7.22,16.84 7.34,16.96 7.6,17.22 7.73,17.34 12.43,17.34 J1X.DIR
XDIR1
  Top 0.254: IC1X1.19 42.75,13.65 41.22,15.19 41.22,16.84 41.34,16.96 41.6,17.22 41.73,17.34 46.42,17.34 J1X1.DIR
XDIR2
  Top 0.254: IC1X2.19 25.75,13.65 24.22,15.19 24.22,16.84 24.34,16.96 24.6,17.22 24.73,17.34 29.43,17.34 J1X2.DIR
XDIR3
  Top 0.254: IC1X3.19 8.75,34.65 7.22,36.19 7.22,37.84 7.34,37.96 7.6,38.22 7.73,38.34 12.43,38.34 J1X3.DIR
XDIR4
  Top 0.254: IC1X4.19 42.75,34.65 41.22,36.19 41.22,37.84 41.34,37.96 41.6,38.22 41.73,38.34 46.42,38.34 J1X4.DIR
XENABLE
  Top 0.254: J1X.!EN 14.08,1.72 R2X.2 8.25,3.63 8.11,3.77 8.11,6.8 8.25,6.95 IC1X.2
XENABLE1
  Top 0.254: J1X1.!EN 48.08,1.72 R2X1.2 42.25,3.63 42.11,3.77 42.11,6.8 42.25,6.95 IC1X1.2
XENABLE2
  Top 0.254: J1X2.!EN 31.08,1.72 R2X2.2 25.25,3.63 25.11,3.77 25.11,6.8 25.25,6.95 IC1X2.2
XENABLE3
  Top 0.254: J1X3.!EN 14.08,22.72 R2X3.2 8.25,24.63 8.11,24.77 8.11,27.8 8.25,27.95 IC1X3.2
XENABLE4
  Top 0.254: J1X4.!EN 48.08,22.72 R2X4.2 42.25,24.63 42.11,24.77 42.11,27.8 42.25,27.95 IC1X4.2
XMS1
  Top 0.254: IC1X.9 12.41,9.36 12.68,9.09 12.68,7.82 13.19,7.31 13.19,5.15 J1X.MS1
XMS2
  Top 0.254: J1X.MS2 14.33,6.93 13.19,8.07 13.19,9.34 12.68,9.85 12.67,9.86 IC1X.10
XMS3
  Top 0.254: J1X.MS3 13.06,10.36 IC1X.11
XMS4
  Top 0.254: IC1X1.9 46.41,9.36 46.68,9.09 46.68,7.82 47.19,7.31 47.19,5.15 J1X1.MS1
XMS5
  Top 0.254: J1X1.MS2 48.33,6.93 47.19,8.07 47.19,9.34 46.68,9.85 46.67,9.86 IC1X1.10
XMS6
  Top 0.254: J1X1.MS3 47.06,10.36 IC1X1.11
XMS7
  Top 0.254: IC1X2.9 29.41,9.36 29.68,9.09 29.68,7.82 30.19,7.31 30.19,5.15 J1X2.MS1
XMS8
  Top 0.254: J1X2.MS2 31.33,6.93 30.19,8.07 30.19,9.34 29.68,9.85 29.67,9.86 IC1X2.10
XMS9
  Top 0.254: J1X2.MS3 30.06,10.36 IC1X2.11
XMS10
  Top 0.254: IC1X3.9 12.41,30.36 12.68,30.09 12.68,28.82 13.19,28.31 13.19,26.15 J1X3.MS1
XMS11
  Top 0.254: J1X3.MS2 14.33,27.93 13.19,29.07 13.19,30.34 12.68,30.85 12.67,30.86 IC1X3.10
XMS12
  Top 0.254: J1X3.MS3 13.06,31.36 IC1X3.11
XMS13
  Top 0.254: IC1X4.9 46.41,30.36 46.68,30.09 46.68,28.82 47.19,28.31 47.19,26.15 J1X4.MS1
XMS14
  Top 0.254: J1X4.MS2 48.33,27.93 47.19,29.07 47.19,30.34 46.68,30.85 46.67,30.86 IC1X4.10
XMS15
  Top 0.254: J1X4.MS3 47.06,31.36 IC1X4.11
XOUT1A
  Top 0.254: IC1X.24 5.7,10.86 5.57,10.87
  Top 0.762: J1X.1A 2.39,10.87 5.57,10.87
XOUT1A1
  Top 0.254: IC1X1.24 39.7,10.86 39.57,10.87
  Top 0.762: J1X1.1A 36.39,10.87 39.57,10.87
XOUT1A2
  Top 0.254: IC1X2.24 22.7,10.86 22.57,10.87
  Top 0.762: J1X2.1A 19.39,10.87 22.57,10.87
XOUT1A3
  Top 0.254: IC1X3.24 5.7,31.86 5.57,31.87
  Top 0.762: J1X3.1A 2.39,31.87 5.57,31.87
XOUT1A4
  Top 0.254: IC1X4.24 39.7,31.86 39.57,31.87
  Top 0.762: J1X4.1A 36.39,31.87 39.57,31.87
XOUT1B
  Top 0.254: 7.47,12.77 7.74,12.77 IC1X.21
  Top 0.762: J1X.1B 2.39,13.41 6.84,13.41 7.47,12.77
XOUT1B1
  Top 0.254: 41.47,12.77 41.74,12.77 IC1X1.21
  Top 0.762: J1X1.1B 36.39,13.41 40.84,13.41 41.47,12.77
XOUT1B2
  Top 0.254: 24.47,12.77 24.74,12.77 IC1X2.21
  Top 0.762: J1X2.1B 19.39,13.41 23.84,13.41 24.47,12.77
XOUT1B3
  Top 0.254: 7.47,33.77 7.74,33.77 IC1X3.21
  Top 0.762: J1X3.1B 2.39,34.41 6.84,34.41 7.47,33.77
XOUT1B4
  Top 0.254: 41.47,33.77 41.74,33.77 IC1X4.21
  Top 0.762: J1X4.1B 36.39,34.41 40.84,34.41 41.47,33.77
XOUT2A
  Top 0.254: IC1X.26 5.7,9.86 5.57,9.85
  Top 0.762: J1X.2A 2.39,9.85 5.57,9.85
XOUT2A1
  Top 0.254: IC1X1.26 39.7,9.86 39.57,9.85
  Top 0.762: J1X1.2A 36.39,9.85 39.57,9.85
XOUT2A2
  Top 0.254: IC1X2.26 22.7,9.86 22.57,9.85
  Top 0.762: J1X2.2A 19.39,9.85 22.57,9.85
XOUT2A3
  Top 0.254: IC1X3.26 5.7,30.86 5.57,30.85
  Top 0.762: J1X3.2A 2.39,30.85 5.57,30.85
XOUT2A4
  Top 0.254: IC1X4.26 39.7,30.86 39.57,30.85
  Top 0.762: J1X4.2A 36.39,30.85 39.57,30.85
XOUT2B
  Top 0.254: 7.47,7.95 7.74,7.95 IC1X.1
  Top 0.762: J1X.2B 2.39,7.31 6.84,7.31 7.47,7.95
XOUT2B1
  Top 0.254: 41.47,7.95 41.74,7.95 IC1X1.1
  Top 0.762: J1X1.2B 36.39,7.31 40.84,7.31 41.47,7.95
XOUT2B2
  Top 0.254: 24.47,7.95 24.74,7.95 IC1X2.1
  Top 0.762: J1X2.2B 19.39,7.31 23.84,7.31 24.47,7.95
XOUT2B3
  Top 0.254: 7.47,28.95 7.74,28.95 IC1X3.1
  Top 0.762: J1X3.2B 2.39,28.31 6.84,28.31 7.47,28.95
XOUT2B4
  Top 0.254: 41.47,28.95 41.74,28.95 IC1X4.1
  Top 0.762: J1X4.2B 36.39,28.31 40.84,28.31 41.47,28.95
XREF
  Top 0.254: IC1X.17 9.75,14.25 T1X.2
XREF1
  Top 0.254: IC1X1.17 43.75,14.25 T1X1.2
XREF2
  Top 0.254: T1X.3 5.61,18.8 R1X.2
XREF3
  Top 0.254: T1X1.3 39.6,18.8 R1X1.2
XREF4
  Top 0.254: IC1X2.17 26.75,14.25 T1X2.2
XREF5
  Top 0.254: T1X2.3 22.61,18.8 R1X2.2
XREF6
  Top 0.254: IC1X3.17 9.75,35.25 T1X3.2
XREF7
  Top 0.254: T1X3.3 5.61,39.8 R1X3.2
XREF8
  Top 0.254: IC1X4.17 43.75,35.25 T1X4.2
XREF9
  Top 0.254: T1X4.3 39.6,39.8 R1X4.2
XRESET
  Top 0.254: J1X.!RST 13.56,10.86 IC1X.12
XRESET1
  Top 0.254: J1X1.!RST 47.56,10.86 IC1X1.12
XRESET2
  Top 0.254: J1X2.!RST 30.56,10.86 IC1X2.12
XRESET3
  Top 0.254: J1X3.!RST 13.56,31.86 IC1X3.12
XRESET4
  Top 0.254: J1X4.!RST 47.56,31.86 IC1X4.12
XROSC
  Top 0.254: IC1X.13 12.41,11.36 12.68,11.63 12.68,12.63 R4X.1
XROSC1
  Top 0.254: IC1X1.13 46.41,11.36 46.68,11.63 46.68,12.63 R4X1.1
XROSC2
  Top 0.254: IC1X2.13 29.41,11.36 29.68,11.63 29.68,12.63 R4X2.1
XROSC3
  Top 0.254: IC1X3.13 12.41,32.36 12.68,32.63 12.68,33.63 R4X3.1
XROSC4
  Top 0.254: IC1X4.13 46.41,32.36 46.68,32.63 46.68,33.63 R4X4.1
XSENSE1
  Top 0.254: IC1X.23 6.09,11.36 5.69,11.76
  Top 0.508: 5.69,11.76 5.31,12.14 S2X.2
XSENSE2
  Top 0.254: IC1X.27 6.09,9.36 5.69,8.96
  Top 0.508: 5.69,8.96 5.31,8.58 S1X.2
XSENSE3
  Top 0.254: IC1X1.27 40.09,9.36 39.69,8.96
  Top 0.508: 39.69,8.96 39.31,8.58 S1X1.2
XSENSE4
  Top 0.254: IC1X1.23 40.09,11.36 39.69,11.76
  Top 0.508: 39.69,11.76 39.31,12.14 S2X1.2
XSENSE5
  Top 0.254: IC1X2.27 23.09,9.36 22.69,8.96
  Top 0.508: 22.69,8.96 22.31,8.58 S1X2.2
XSENSE6
  Top 0.254: IC1X2.23 23.09,11.36 22.69,11.76
  Top 0.508: 22.69,11.76 22.31,12.14 S2X2.2
XSENSE7
  Top 0.254: IC1X3.27 6.09,30.36 5.69,29.96
  Top 0.508: 5.69,29.96 5.31,29.58 S1X3.2
XSENSE8
  Top 0.254: IC1X3.23 6.09,32.36 5.69,32.76
  Top 0.508: 5.69,32.76 5.31,33.14 S2X3.2
XSENSE9
  Top 0.254: IC1X4.27 40.09,30.36 39.69,29.96
  Top 0.508: 39.69,29.96 39.31,29.58 S1X4.2
XSENSE10
  Top 0.254: IC1X4.23 40.09,32.36 39.69,32.76
  Top 0.508: 39.69,32.76 39.31,33.14 S2X4.2
XSLEEP
  Top 0.254: J1X.!SLP 13.31,15.19 12.81,15.69 R3X.2 11.28,15.17 11.28,12.27 11.65,11.9 IC1X.14
XSLEEP1
  Top 0.254: J1X1.!SLP 47.31,15.19 46.81,15.69 R3X1.2 45.28,15.17 45.28,12.27 45.65,11.9 IC1X1.14
XSLEEP2
  Top 0.254: J1X2.!SLP 30.31,15.19 29.81,15.69 R3X2.2 28.28,15.17 28.28,12.27 28.65,11.9 IC1X2.14
XSLEEP3
  Top 0.254: J1X3.!SLP 13.31,36.19 12.81,36.69 R3X3.2 11.28,36.17 11.28,33.27 11.65,32.9 IC1X3.14
XSLEEP4
  Top 0.254: J1X4.!SLP 47.31,36.19 46.81,36.69 R3X4.2 45.28,36.17 45.28,33.27 45.65,32.9 IC1X4.14
XSTEP
  Top 0.254: IC1X.16 10.25,14.57 9.12,15.69 9,15.82 9,16.33 9.5,16.84 9.63,16.84 14.2,16.84 J1X.STEP
XSTEP1
  Top 0.254: IC1X1.16 44.25,14.57 43.12,15.69 43,15.82 43,16.33 43.5,16.84 43.63,16.84 48.2,16.84 J1X1.STEP
XSTEP2
  Top 0.254: IC1X2.16 27.25,14.57 26.12,15.69 26,15.82 26,16.33 26.5,16.84 26.63,16.84 31.2,16.84 J1X2.STEP
XSTEP3
  Top 0.254: IC1X3.16 10.25,35.57 9.12,36.69 9,36.82 9,37.33 9.5,37.84 9.63,37.84 14.2,37.84 J1X3.STEP
XSTEP4
  Top 0.254: IC1X4.16 44.25,35.57 43.12,36.69 43,36.82 43,37.33 43.5,37.84 43.63,37.84 48.2,37.84 J1X4.STEP
XVCP
  Top 0.254: IC1X.6 10.25,7.07 10.39,6.93 10.65,6.93 10.9,6.68 10.9,4.66 C6X.2
XVCP1
  Top 0.254: IC1X1.6 44.25,7.07 44.39,6.93 44.65,6.93 44.9,6.68 44.9,4.66 C6X1.2
XVCP2
  Top 0.254: IC1X2.6 27.25,7.07 27.39,6.93 27.65,6.93 27.9,6.68 27.9,4.66 C6X2.2
XVCP3
  Top 0.254: IC1X3.6 10.25,28.07 10.39,27.93 10.65,27.93 10.9,27.68 10.9,25.66 C6X3.2
XVCP4
  Top 0.254: IC1X4.6 44.25,28.07 44.39,27.93 44.65,27.93 44.9,27.68 44.9,25.66 C6X4.2
XVREG
  Top 0.254: IC1X.8 11.65,7.47 C7X.2
XVREG1
  Top 0.254: IC1X1.8 45.65,7.47 C7X1.2
XVREG2
  Top 0.254: IC1X2.8 28.65,7.47 C7X2.2
XVREG3
  Top 0.254: IC1X3.8 11.65,28.47 C7X3.2
XVREG4
  Top 0.254: IC1X4.8 45.65,28.47 C7X4.2

## Text on the board
_tsilk: R1X | T1X | R1X | T1X | R3X | R3X | C4X | Rev 0.1 | StepStick | C4X | Rev 0.1 | StepStick | R4X | R4X | S2X | S2X | S1X | A4988 | S1X | A4988 | C7X | C7X | C2X | C5X | C2X | C5X | C1X | C1X | C6X | C6X | R2X | R2X | C3X | C3X | R1X | T1X | R1X | T1X | R1X | T1X | R3X | R3X | R3X | C4X | Rev 0.1 | StepStick | C4X | Rev 0.1 | StepStick | C4X | Rev 0.1 | StepStick | R4X | R4X | R4X | S2X | S2X | S2X | S1X | A4988 | S1X | A4988 | S1X | A4988 | C7X | C7X | C7X | C2X | C5X | C2X | C5X | C2X | C5X | C1X | C1X | C1X | C6X | C6X | C6X | R2X | R2X | R2X | C3X | C3X | C3X
_bsilk: GND | GND | DIRECTION | DIRECTION | VDD | VDD | STEP | STEP | 1B | !SLEEP | 1B | !SLEEP | 1A | 1A | !RESET | !RESET | 2A | MS3 | 2A | MS3 | 2B | 2B | MS2 | MS2 | GND | reprap.org/wiki/stepstick | MS1 | GND | reprap.org/wiki/stepstick | MS1 | VMOT | VMOT | !ENABLE | !ENABLE | GND | GND | GND | DIRECTION | DIRECTION | DIRECTION | VDD | VDD | VDD | STEP | STEP | STEP | 1B | !SLEEP | 1B | !SLEEP | 1B | !SLEEP | 1A | 1A | 1A | !RESET | !RESET | !RESET | 2A | MS3 | 2A | MS3 | 2A | MS3 | 2B | 2B | 2B | MS2 | MS2 | MS2 | GND | reprap.org/wiki/stepstick | MS1 | GND | reprap.org/wiki/stepstick | MS1 | GND | reprap.org/wiki/stepstick | MS1 | VMOT | VMOT | VMOT | !ENABLE | !ENABLE | !ENABLE